# Altium PCB Arduino_clokc.PcbDoc
Units mil, origin at the board's own origin, x right, y up, seen from the top; angles counter-clockwise.
Board outline 2985 x 2380 mil, 2 copper layers (Top Layer, Bottom Layer); 14 components, 30 nets, 81 pads, 1 vias.
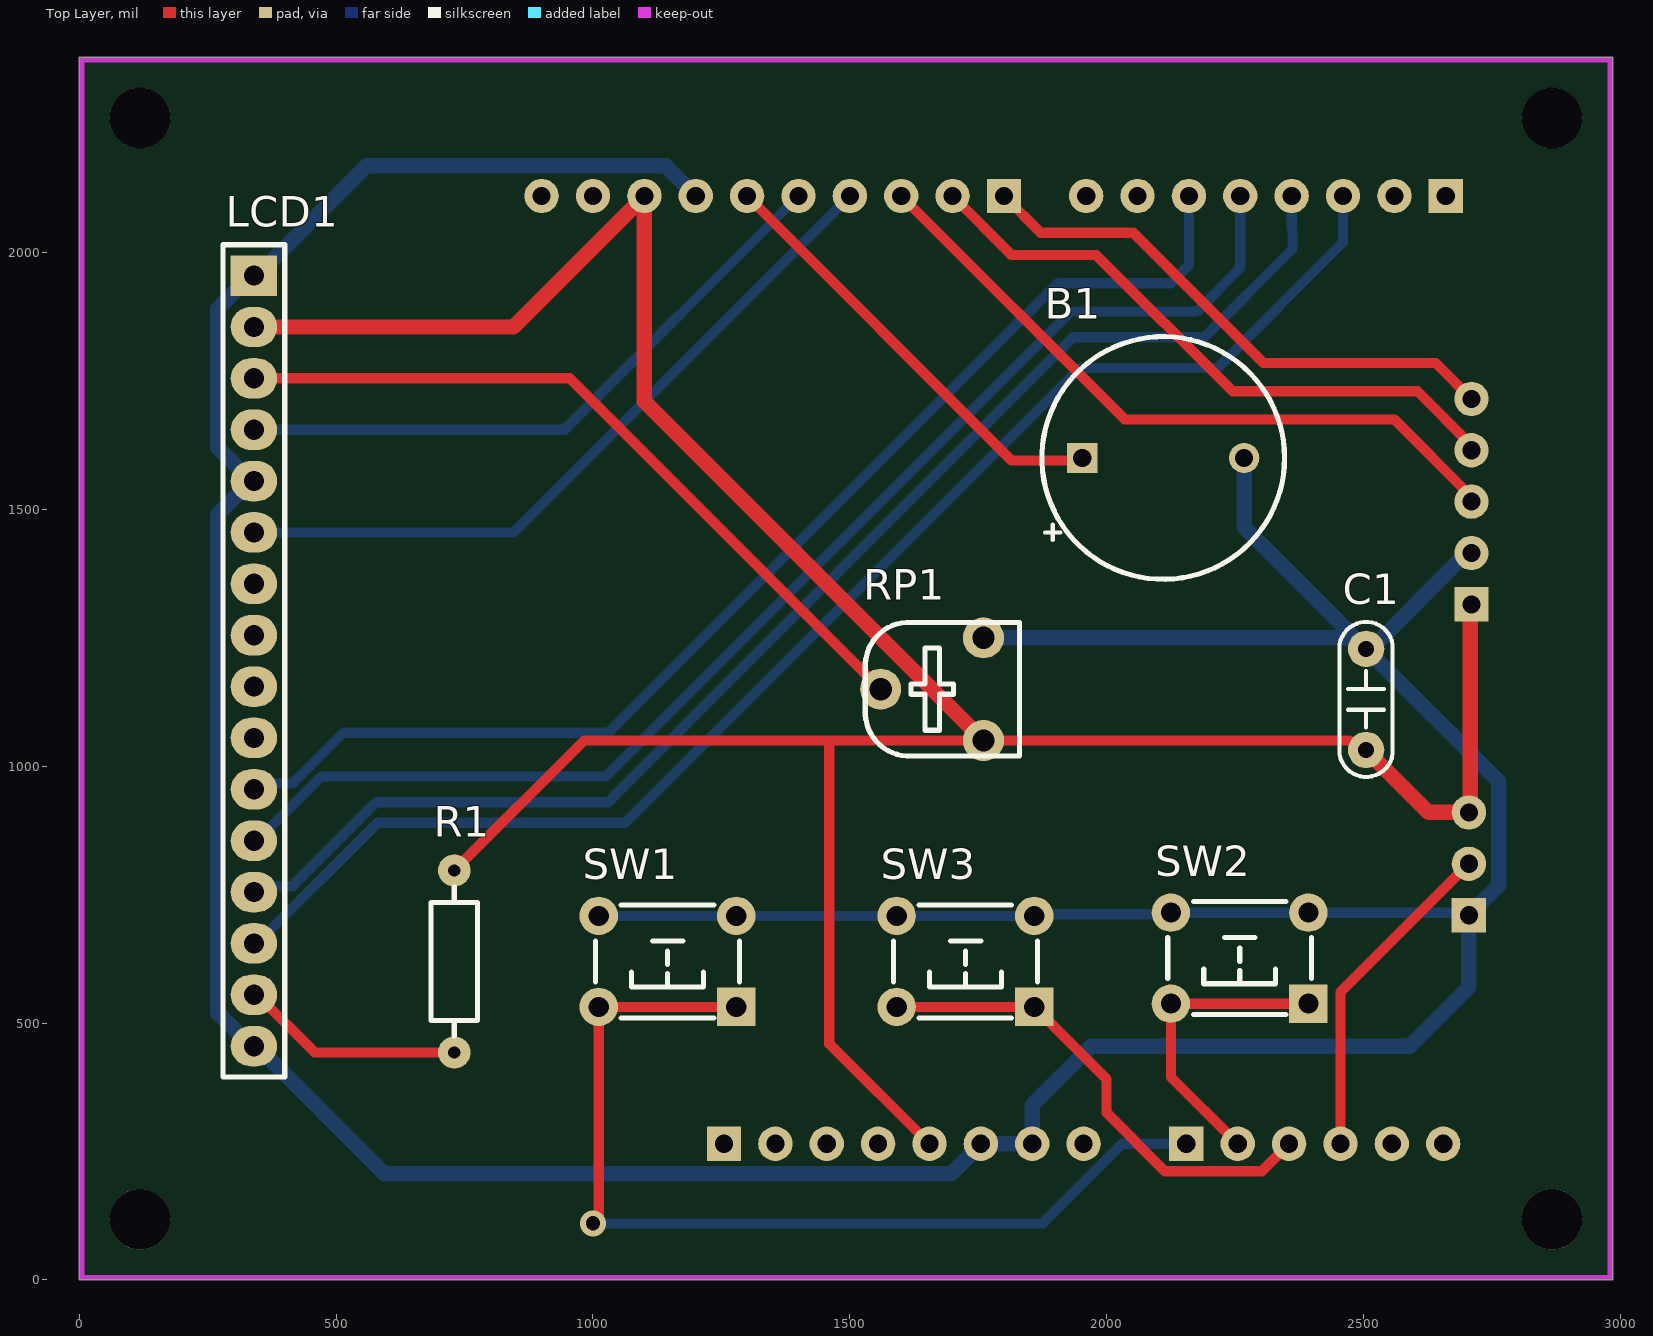
[diagram p0: Top Layer view]
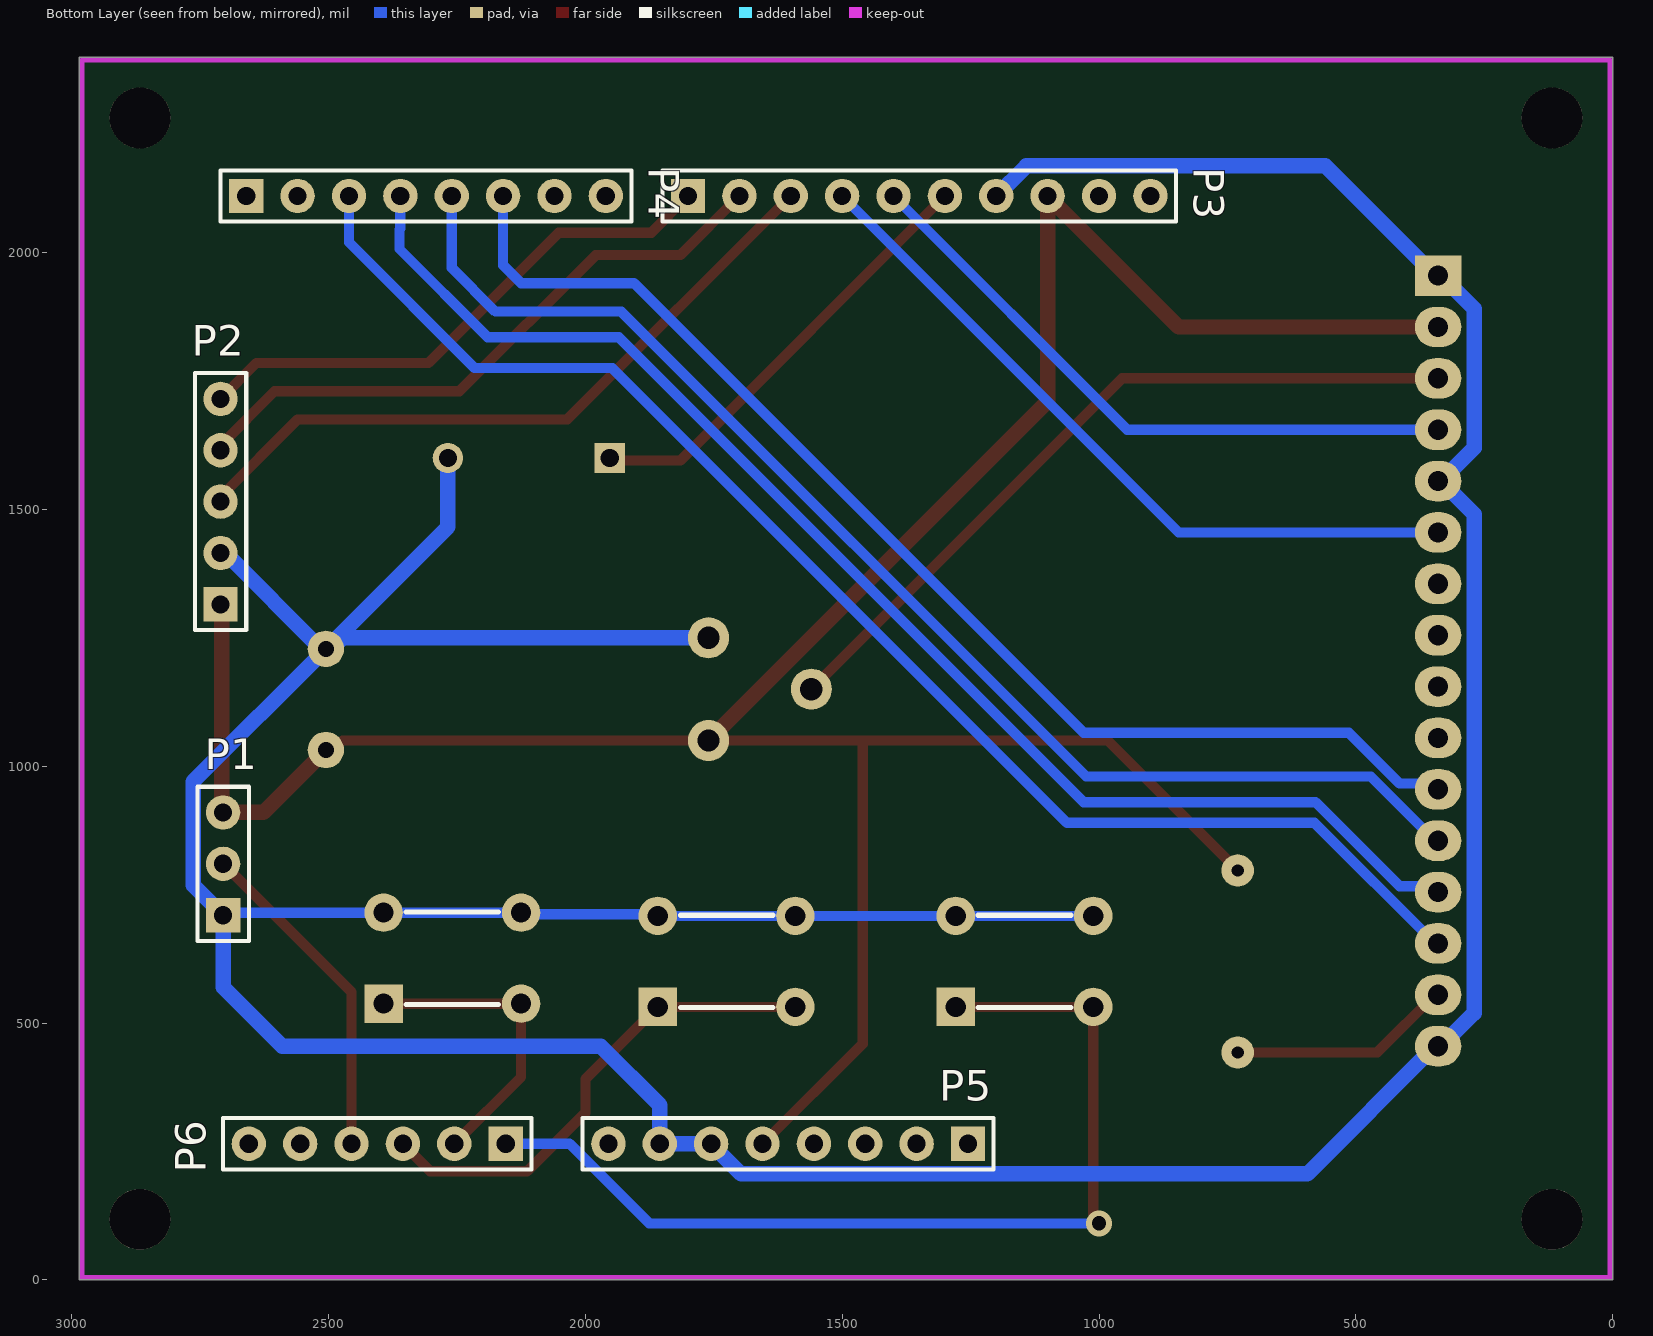
[diagram p1: Bottom Layer view, seen from below]

## Layer stack, top to bottom
Top Solder: solder mask 0.4, Solder Resist, Dk 3.5
Top Layer: signal copper 1.4
Dielectric 1: dielectric 12.6, FR-4, Dk 4.8
Bottom Layer: signal copper 1.4
Bottom Solder: solder mask 0.4, Solder Resist, Dk 3.5

## Board outline
0,0 0,2380 2985,2380 2985,0

## Design rules (kind name [scope] priority, off if disabled: settings)
Clearance [All] p1: gap=10 ignorepadtopadclearanceinfootprint=FALSE except(0: Arc-Hole Track-Hole SMDPad-Hole THPad-Hole Via-Hole Fill-Hole Poly-Hole Region-Hole Text-Hole)
PolygonConnect [All] p1: connectstyle=Relief reliefconductorwidth=10 reliefentries=4 polygonreliefangle="90 Angle" airgapwidth=10
RoutingVias [All] p1: holewidth=28 width=50 viastyle="Through Hole" minholewidth=28 minwidth=50 maxholewidth=28 maxwidth=50
SolderMaskExpansion [All] p1: expansion=4 istentingtop=FALSE
Width POWER [InNetClass('POWER')] p1: maxlimit=60 minlimit=30 preferedwidth=30 minimp=50.000000 maximp=50.000000 favimp=50.000000
Width [All] p2: maxlimit=60 minlimit=20 preferedwidth=20 minimp=50.000000 maximp=50.000000 favimp=50.000000
30 further rules are at their usual default settings.

## Components (designator, comment, footprint, x,y, rotation, side; value= is the part's Value field where it differs from the comment)
B1 "BEEP" Beep 2110,1600 r0 top
C1 "0.1uF" "CY 5*7*2.5" 2505,1130 r270 top
LCD1 "LCD1602" 1602-1 340,1155 r270 top
P1 "Header 3" HDR2.54-LI-3P 2705,810 r90 bottom
P2 "HDR-1X5" HDR2.54-LI-5P 2710,1515 r90 bottom
P3 "Header 10" HDR2.54-LI-10P 1350,2110 r180 bottom
P4 "Header 8" HDR2.54-LI-8P 2310,2110 r180 bottom
P5 "Header 8" HDR2.54-LI-8P 1605,265 r0 bottom
P6 "Header 6" HDR2.54-LI-6P 2405,265 r0 bottom
R1 "100" AXIAL0.4-1/4W 730,620 r90 top
RP1 "10K" RM065 1560,1150 r90 top
SW1 "6x6x5" "TSW DIP-6*6*6" 1145,620 r180 top
SW2 "6x6x5" "TSW DIP-6*6*6" 2258.86,626.42 r180 top
SW3 "6x6x5" "TSW DIP-6*6*6" 1725,620 r180 top

## Footprints (in the part's own frame and the unit in brackets; to place one, negate y for a bottom-side part, rotate by r counter-clockwise, add the part's x,y. Pads: shape width x height; smd on the part's side, far side on the other; paste and mask are expansions set on the pad)
1602-1 [mm]
  rect 2x2.3 hole 1: 1(-20.32,0)
  oval 2x2.3 hole 1: 2(-17.78,0) 3(-15.24,0) 4(-12.7,0) 5(-10.16,0) 6(-7.62,0) 7(-5.08,0) 8(-2.54,0) 9(0,0) 10(2.54,0) 11(5.08,0) 12(7.62,0) 13(10.16,0) 14(12.7,0) 15(15.24,0) 16(17.78,0)
  silkscreen extent -21.84,-1.52 19.3,1.52
AXIAL0.4-1/4W [mm] "脚距9mm，直径2.3mm"
  round 1.6 hole 0.6: 1(-4.5,0) 2(4.5,0)
  silkscreen extent -3.68,-1.14 3.68,1.14, body extent -4.72,-1.16 4.73,1.16, height 2.32
Beep [mm] "蜂鸣器"
  rect 1.5x1.5 hole 0.9: 1(-4,0)
  round 1.5 hole 0.9: 2(4,0)
  silkscreen extent -6,-6 6,6
"CY 5*7*2.5" [mm] "脚距5mm，直径7mm，厚2.5mm"
  round 1.8 hole 0.8: 1(-2.5,0) 2(2.5,0)
  silkscreen extent -3.83,-1.31 3.83,1.31, body extent -3.5,-1.25 3.5,1.25, height 7
HDR2.54-LI-3P [mm] "排针，3脚"
  rect 1.7x1.7 hole 0.9: 1(-2.54,0)
  round 1.7 hole 0.9: 2(0,0) 3(2.54,0)
  silkscreen extent -3.81,-1.27 3.81,1.27, body extent -3.81,-1.27 3.81,1.27, height 8.5
HDR2.54-LI-5P [mm] "排针，5脚"
  rect 1.7x1.7 hole 0.9: 1(-5.08,0)
  round 1.7 hole 0.9: 2(-2.54,0) 3(0,0) 4(2.54,0) 5(5.08,0)
  silkscreen extent -6.35,-1.27 6.35,1.27, body extent -6.35,-1.27 6.35,1.27, height 8.5
HDR2.54-LI-6P [mm] "排针，6脚"
  rect 1.7x1.7 hole 0.9: 1(-6.35,0)
  round 1.7 hole 0.9: 2(-3.81,0) 3(-1.27,0) 4(1.27,0) 5(3.81,0) 6(6.35,0)
  silkscreen extent -7.62,-1.27 7.62,1.27, body extent -7.62,-1.27 7.62,1.27, height 8.5
HDR2.54-LI-8P [mm] "排针，8脚"
  rect 1.7x1.7 hole 0.9: 1(-8.89,0)
  round 1.7 hole 0.9: 2(-6.35,0) 3(-3.81,0) 4(-1.27,0) 5(1.27,0) 6(3.81,0) 7(6.35,0) 8(8.89,0)
  silkscreen extent -10.16,-1.27 10.16,1.27, body extent -10.16,-1.27 10.16,1.27, height 8.5
HDR2.54-LI-10P [mm] "排针，10脚"
  rect 1.7x1.7 hole 0.9: 1(-11.43,0)
  round 1.7 hole 0.9: 2(-8.89,0) 3(-6.35,0) 4(-3.81,0) 5(-1.27,0) 6(1.27,0) 7(3.81,0) 8(6.35,0) 9(8.89,0) 10(11.43,0)
  silkscreen extent -12.7,-1.27 12.7,1.27, body extent -12.7,-1.27 12.7,1.27, height 8.5
RM065 [mil] "蓝白可调电位器"
  round 80 hole 43.31: 1(-100,-200) 2(0,0) 3(100,-200)
  silkscreen extent -130,-270 130,30, body extent -128,-269 128,30, height 299
"TSW DIP-6*6*6" [mm] "6*6*6mm"
  rect 1.9x1.9 hole 1: 1(-3.4,2.25)
  round 1.9 hole 1: 2(-3.4,-2.25) 3(3.4,-2.25) 4(3.4,2.25)
  silkscreen extent -3.56,-2.79 3.56,2.79, body extent -4.11,-3 4.11,3, height 5.95

## Part data
B1: "蜂鸣器"
C1: library part C-CY, "高压陶瓷电容，Y电容", BOM名称=高压陶瓷电容，Y电容, 学习资源=www.ooocke.com, 版权归属=源创客
P1 P6: "接插件", LatestRevisionDate=17-Jul-2002, LatestRevisionNote="Re-released for DXP Platform.", Publisher="Altium Limited"
P2: library part "Header 5", "5P接插件", BOM名称=5P接插件, 学习资源=www.ooocke.com, 版权归属=源创客
P3: "Header, 10-Pin", LatestRevisionDate=17-Jul-2002, LatestRevisionNote="Re-released for DXP Platform.", Publisher="Altium Limited"
P4 P5: "Header, 8-Pin", LatestRevisionDate=17-Jul-2002, LatestRevisionNote="Re-released for DXP Platform.", Publisher="Altium Limited"
R1: library part R, "贴片电阻", BOM名称=贴片电阻, 学习资源=www.ooocke.com, 版权归属=源创客
RP1: library part RP-ID, "插件单联电位器", BOM名称=插件电位器, 学习资源=www.ooocke.com, 版权归属=源创客
SW1 SW2 SW3: library part "TSW DIP-6x6", "直插6x6轻触开关", BOM名称=直插6x6轻触开关, 学习资源=www.ooocke.com, 版权归属=源创客

## Free pads (board coordinates)
  round 118.11 hole 118.11 unplated: 3(118.11,118.11) 3(118.11,2261.89) 3(2866.89,118.11) 3(2866.89,2261.89)

## Via types
v1: diameter 50, hole 28, Top Layer to Bottom Layer, tented both sides, 1 vias

## Nets (pads, with @x,y where several pads share a name; then routed paths per layer and width w, separated by ;. In a path a pad name is that pad's centre, name@x,y a point inside that pad or via, vN(x,y) a via of type N, cw(c..) or ccw(c..) an arc to the next point about the centre after c; other vN are vias at no path point)
3.3V: P5.4
5V: C1.2 LCD1.2 P1.3 P2.1 P3.8 P5.5 R1.2 RP1.1 | length 5609.6
  Top Layer w20: R1.2 982.83,1050 1460,1050 ; P5.5 1460,460 1460,1050 ; C1.2 2491.24,1031.57 2472.81,1050 RP1.1 1460,1050
  Top Layer w30: LCD1.2 845,1855 P3.8 1100,1710 RP1.1 ; C1.2 2626.54,910.04 P1.3 P1.3 2707.5,912.5 2707.5,1312.5 P2.1
A0: P6.1 SW1.1 SW1.4 | length 1913
  Top Layer w20: v1(1000,110) 1000,118.12 1011.14,129.26 SW1.4 SW1.1
  Bottom Layer w20: v1(1000,110) 1875.61,110 2030.61,265 P6.1
A1: P6.2 SW2.1 SW2.4 | length 594.4
  Top Layer w20: P6.2 2125,395 SW2.4 SW2.1
A2: P6.3 SW3.1 SW3.4 | length 956.9
  Top Layer w20: SW3.4 SW3.1 1999.76,390.52 1999.76,325.03 2113.25,211.54 2301.54,211.54 P6.3
A3: P1.2 P6.4 | length 648.6
  Top Layer w20: P6.4 2455,560 P1.2
A4: P6.5
A5: P6.6
D0: P4.1
D1: P4.2
D2: LCD1.14 P4.3 | length 2775.4
  Bottom Layer w20: LCD1.14 345.91,655 580.91,890 1062.5,890 1947.5,1775 2215,1775 2460,2020 P4.3
D3: LCD1.13 P4.4 | length 2644.2
  Bottom Layer w20: LCD1.13 351.24,766.24 414.72,766.24 578.48,930 1030,930 1935,1835 2190,1835 2361.72,2006.72 2361.72,2044.82 2360,2046.54 P4.4
D4: LCD1.12 P4.5 | length 2521.8
  Bottom Layer w20: LCD1.12 345.91,855 470.91,980 1025,980 1930,1885 2175,1885 2260,1970 P4.5
D5: LCD1.11 P4.6 | length 2377.5
  Bottom Layer w20: LCD1.11 351.24,966.24 414.72,966.24 513.48,1065 1030,1065 1905,1940 2125,1940 2160,1975 P4.6
D6: P4.7
D7: P4.8
D8: P2.5 P3.1 | length 1073.6
  Top Layer w20: P3.1 1871.73,2038.27 2051.73,2038.27 2305,1785 2640,1785 P2.5
D9: P2.4 P3.2 | length 1220.9
  Top Layer w20: P3.2 1815,1995 1980,1995 2245,1730 2605,1730 2710,1625 P2.4
D10: P2.3 P3.3 | length 1362.3
  Top Layer w20: P3.3 2035,1675 2560,1675 2710,1525 P2.3
D11: LCD1.6 P3.4 | length 1431.3
  Bottom Layer w20: LCD1.6 845,1455 P3.4
D12: LCD1.4 P3.5 | length 1248.5
  Bottom Layer w20: LCD1.4 945,1655 P3.5
D13: B1.1 P3.6 | length 867.9
  Top Layer w20: P3.6 1815,1595 1947.52,1595 B1.1
GND: B1.2 C1.1 LCD1.1 LCD1.5 LCD1.16 P1.1 P2.2 P3.7 P5.6 P5.7 RP1.3 SW1.2 SW1.3 SW2.2 SW2.3 SW3.2 SW3.3 | length 9253.9
  Bottom Layer w20: SW1.3 SW1.2 SW3.3 SW3.2 1862.07,711.79 2121.79,711.79 SW2.3 SW2.2 2700,715 P1.1
  Bottom Layer w30: LCD1.5 LCD1.5@334.09,1555 ; P3.7 1141.54,2168.46 559.37,2168.46 345.91,1955 LCD1.1 334.09,1955 269.72,1890.63 269.72,1619.37 LCD1.5@334.09,1555 ; RP1.3 2472.37,1250 2493.94,1228.43 C1.1 ; B1.2 2267.48,1465.95 C1.1 ; P2.2 2700.79,1415 2514.21,1228.43 C1.1 ; LCD1.5@334.09,1555 269.72,1490.63 269.72,519.37 334.09,455 LCD1.16 345.91,455 594.37,206.54 1696.54,206.54 P5.6 P5.7 1855,340 1970,455 2590,455 2705,570 P1.1 2763.46,768.46 2763.46,969.96 C1.1
IOREF: P5.2
NetLCD1_3: LCD1.3 RP1.2 | length 1470.6
  Top Layer w20: LCD1.3 955,1755 RP1.2
NetLCD1_15: LCD1.15 R1.1 | length 436.5
  Top Layer w20: LCD1.15 345.91,555 458.07,442.83 R1.1
RES: P5.3
SCL: P3.10
SDA: P3.9
VIN: P5.8
pads on no net: LCD1.7 LCD1.8 LCD1.9 LCD1.10 P5.1

## Keep-outs
Keep-Out Layer:
  lines w10: 5,5 2980,5 2980,2375 5,2375 5,5